# Altium PCB Off-Line 3W Non Isolated Power Supply.PcbDoc
Units mm, origin at the board's own origin, x right, y up, seen from the top; angles counter-clockwise.
Board outline 120 x 75 mm, 2 copper layers (Top Layer, Bottom Layer); 18 components, 12 nets, 48 pads, 0 vias.
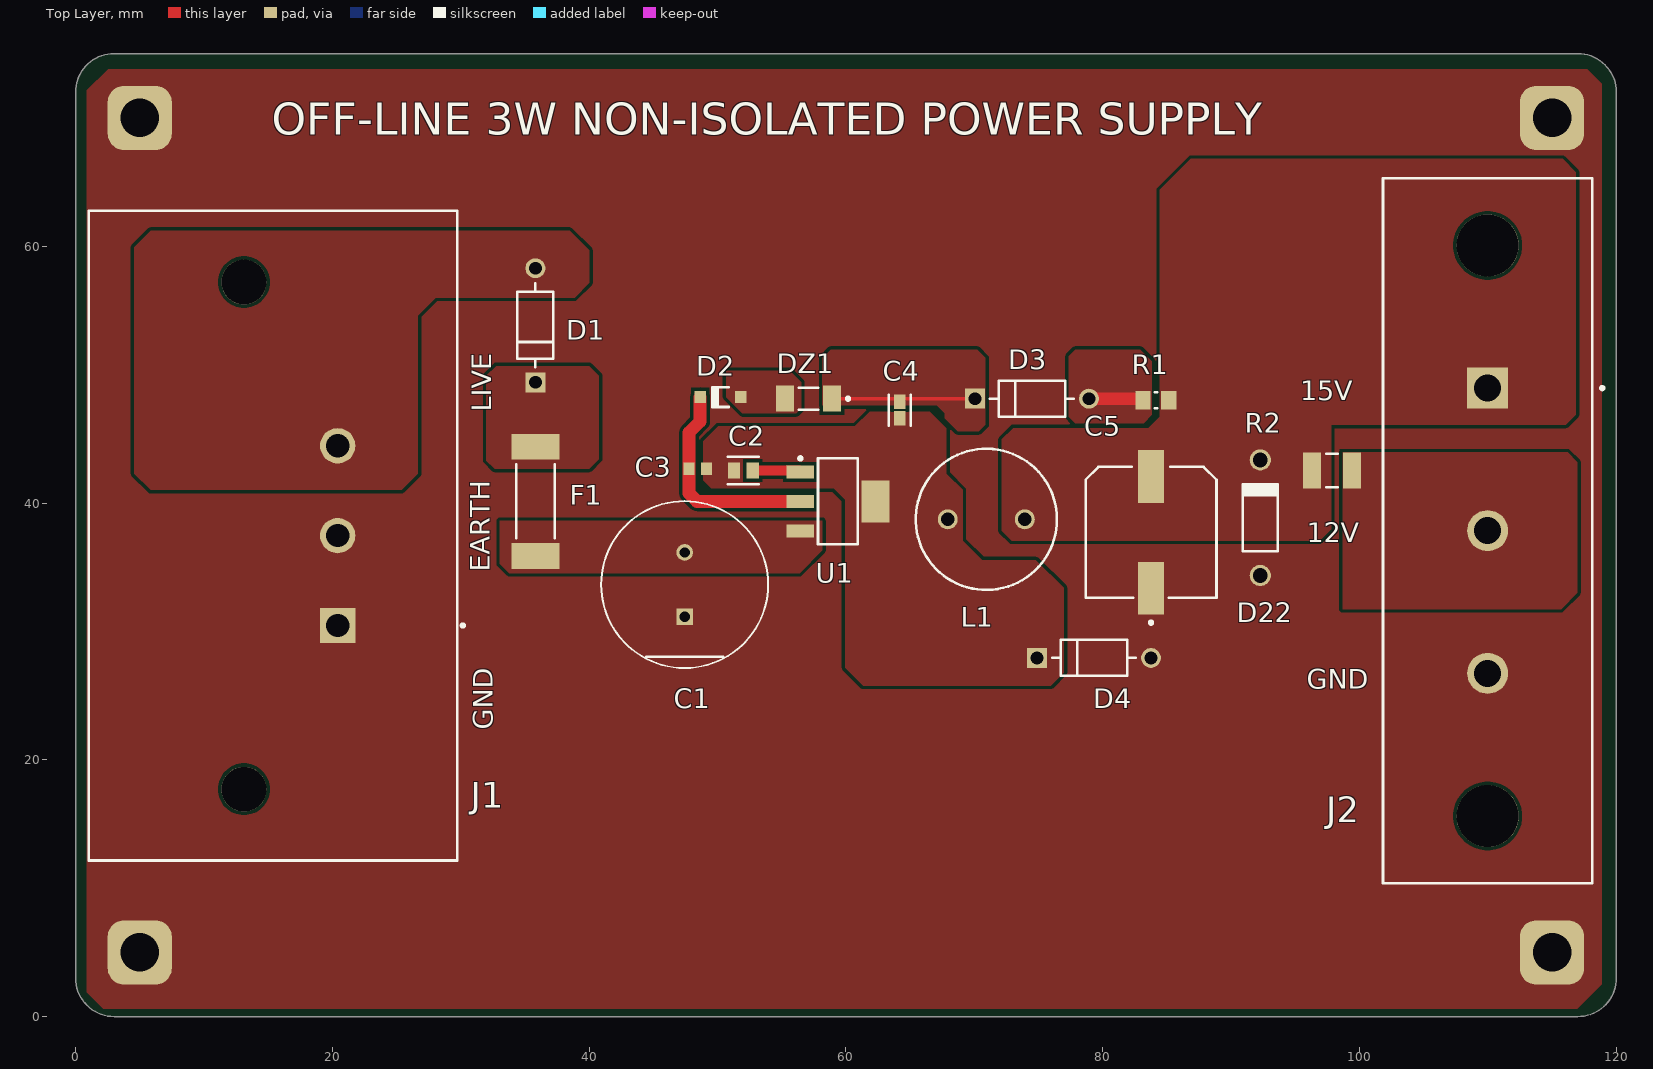
[diagram p0: Top Layer view]
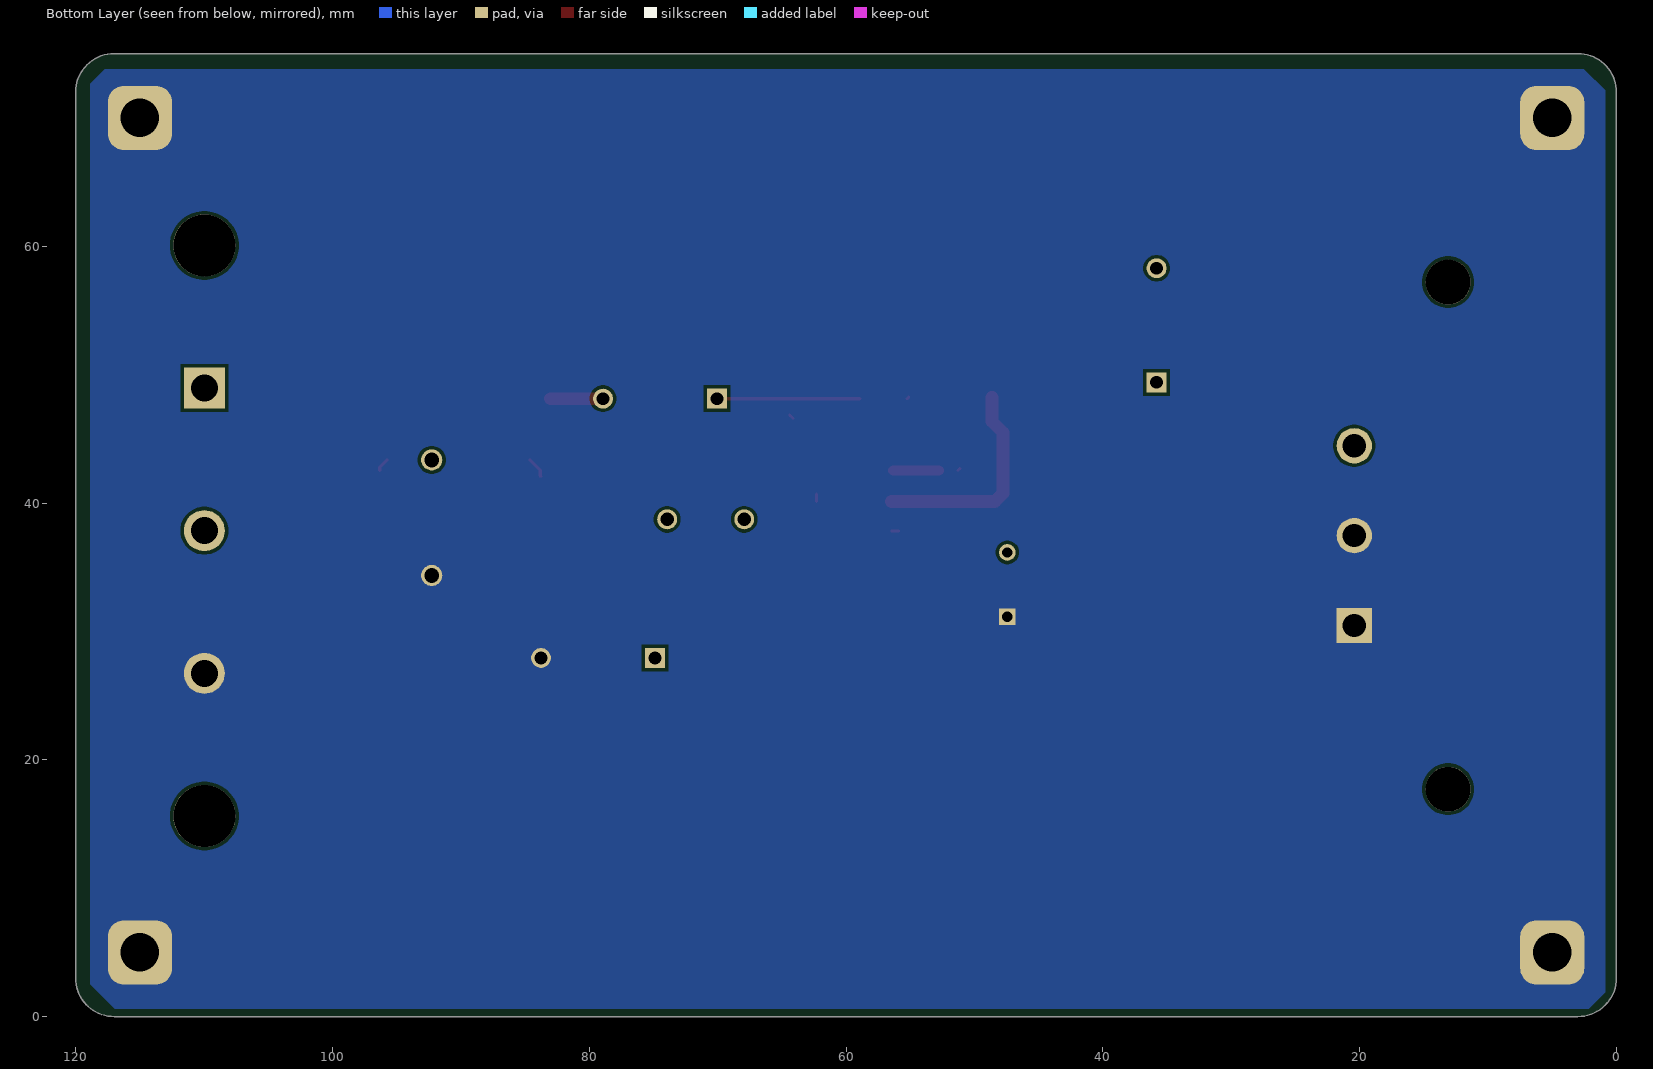
[diagram p1: Bottom Layer view, seen from below]

## Layer stack, top to bottom
Top Solder: solder mask 0.0102, Solder Resist, Dk 3.5
Top Layer: signal copper 0.0356
Dielectric 1: dielectric 0.32, FR-4, Dk 4.8
Bottom Layer: signal copper 0.0356
Bottom Solder: solder mask 0.0102, Solder Resist, Dk 3.5

## Board outline
0.006,3.006 0.006,72.006 cw(c3.006,72.006) 3.006,75.006 117.006,75.006 cw(c117.006,72.006) 120.006,72.006 120.006,3.006 cw(c117.006,3.006) 117.006,0.006 3.006,0.006 cw(c3.006,3.006)

## Design rules (kind name [scope] priority, off if disabled: settings)
Clearance [All] p1: gap=0.254 ignorepadtopadclearanceinfootprint=FALSE except(0: Arc-Hole Track-Hole SMDPad-Hole THPad-Hole Via-Hole Fill-Hole Poly-Hole Region-Hole Text-Hole; 0.1: Arc-SMDPad Track-SMDPad SMDPad-SMDPad)
PolygonConnect [All] p1: connectstyle=Direct reliefconductorwidth=0.254 reliefentries=4 polygonreliefangle="90 Angle" airgapwidth=0.254
RoutingLayers [All] p1: top layer_v5=TRUE bottom layer_v5=FALSE
RoutingVias [All] p1: holewidth=0.711 width=1.27 viastyle="Through Hole" minholewidth=0.711 minwidth=1.27 maxholewidth=0.711 maxwidth=1.27
SolderMaskExpansion [All] p1: expansion=0.102 istentingtop=FALSE
Width [All] p1: maxlimit=2 minlimit=0.254 preferedwidth=0.254
29 further rules are at their usual default settings.

## Components (designator, comment, footprint, x,y, rotation, side; value= is the part's Value field where it differs from the comment)
C1 "EEUEE2G150" FP-RAD-TH-D_12_5_0_5-L_20-MFG 47.438,33.655 r90 top
C2 "GRM21BR61C106KE15L" FP-GRM21B-0_1-IPC_C 52.01,42.545 r180 top
C3 "GRM1885C1H101JA01D" CAPC1608X90X35NL10T15 48.454,42.672 r180 top
C4 "C1608X7R1E224K080AC" FP-C1608-080-0_1-IPC_B 64.198,47.244 r90 top
C5 "EEE-FC1E331AP" FP-FC-G-MFG 83.764,37.719 r90 top
D1 "1N4007" FP-1N4007-MFG 35.814,53.848 r90 top value=15pF
D2 "1N4148W-7-F" DIOD-SOD123-2_V 50.232,48.26 r180 top
D3 "1N4007" FP-1N4007-MFG 74.489,48.133 r0 top value=15pF
D4 "1N4007" FP-1N4007-MFG 79.319,27.94 r0 top value=15pF
D22 "1N4746A" FAIR-DO-41-2_V 92.273,38.862 r90 top
DZ1 "1N5240BUR-1" FP-DO-213AA-MFG 57.09,48.133 r180 top
F1 "3403.0163.11" FP-3403_0163_11-MFG 35.814,40.132 r270 top
J1 "703W-00/52" FP-703W-00-52-MFG 15.367,37.465 r270 top
J2 "38740-6103" FP-38740-6103-MFG 109.982,37.846 r270 top
L1 "RFB1010-182L" COIL-RFB1010-2_V 70.933,38.735 r0 top
R1 "RC0805JR-072KL" RESC2013X60X35ML10T20 84.141,48.006 r0 top
R2 "CRCW121022R0JNEA" RESC3225X60X45ML20T20 97.861,42.545 r0 top
U1 "NCP1055 SOT-223" "NCP1055 SOT-223" 59.376,40.132 r0 top

## Footprints (in the part's own frame and the unit in brackets; to place one, negate y for a bottom-side part, rotate by r counter-clockwise, add the part's x,y. Pads: shape width x height; smd on the part's side, far side on the other; paste and mask are expansions set on the pad)
CAPC1608X90X35NL10T15 [mm] "Chip Capacitor, 2-Leads, Body 1.60x0.80mm, IPC Medium Density"
  rect 0.85x0.95 smd: 1(-0.675,0) 2(0.675,0)
  body extent -0.85,-0.45 0.85,0.45, height 0.9
COIL-RFB1010-2_V [mm] "Radial Leaded, 2-Leads, Dia 11mm, Height 11.5mm, Pin Spacing 6mm"
  round 1.55 hole 1.05: 1(-3,0) 2(3,0)
  Top 3D Body keep-out circle w0.1: c0,0 r5.5
  silkscreen extent -5.5,-5.5 5.5,5.5, body extent -5.5,-5.5 5.5,5.5, height 11.5
DIOD-SOD123-2_V [mm] "SOD123, 2-Leads, Body 2.7x1.55mm, Height 1.45mm"
  rect 0.9x0.95 smd: 1(-1.575,0) 2(1.575,0)
  silkscreen extent -0.64,-0.83 0.64,0.77, body extent -1.35,-0.77 1.35,0.77, height 1.45
FAIR-DO-41-2_V [mm] "2-Leads, Axial leaded, Body 2.72x5.2mm, Pin Spacing 9mm"
  round 1.65 hole 1.15: 1(-4.5,0) 2(4.5,0)
  silkscreen extent -2.6,-1.36 2.6,1.36, body extent -4.93,-1.36 4.93,1.36, height 2.71
FP-1N4007-MFG [mm]
  rect 1.55x1.55 hole 1 paste-1000 mask+0: 1(-4.44,0)
  round 1.55 hole 1 paste-1000 mask+0: 2(4.44,0)
  silkscreen extent -3.26,-1.4 3.26,1.4, body extent -5.32,-1.5 5.32,1.5, height 0.25
FP-703W-00-52-MFG [mm]
  rect 2.75x2.75 hole 1.8 paste-1000 mask+0: 1(7,5.05)
  round 2.75 hole 1.8 paste-1000 mask+0: 2(0,5.05) 3(-7,5.05)
  round 3.5 hole 3.5 unplated paste-1000 mask+0: ""(-19.75,-2.25) ""(19.75,-2.25)
  silkscreen extent -25.3,-14.35 25.3,14.93, body extent -25.4,-14.45 25.4,14.45, height 0.25
FP-3403_0163_11-MFG [mm]
  rect 2x3.75 smd paste+0 mask+0: 1(-4.25,0) 2(4.25,0)
  silkscreen extent -2.88,-1.5 2.88,1.5, body extent -5.55,-1.97 5.55,1.97, height 0.25
FP-38740-6103-MFG [mm]
  rect 3.2x3.2 hole 2.1 paste-1000 mask+0: 1(-11.115,0)
  round 3.2 hole 2.1 paste-1000 mask+0: 2(-0.005,0) 3(11.105,0)
  round 4.83 hole 4.83 unplated paste-1000 mask+0: ""(-22.22,0) ""(22.22,0)
  silkscreen extent -27.45,-8.15 27.45,9.05, body extent -27.55,-8.25 27.55,8.25, height 0.25
FP-C1608-080-0_1-IPC_B [mm]
  rect 1.131x0.912 smd paste+0 mask+0: 1(-0.641,0) 2(0.641,0)
  silkscreen extent -1.21,-0.86 1.21,0.86, body extent -1.46,-0.71 1.46,0.71, height 0.25
FP-DO-213AA-MFG [mm]
  rect 1.4x2.03 smd paste+0 mask+0: 1(-1.84,0) 2(1.84,0)
  silkscreen extent -3.2,-0.85 0.76,0.85, body extent -2.64,-1.11 2.64,1.11, height 0.25
FP-FC-G-MFG [mm]
  rect 4.1x2 smd paste+0 mask+0: 1(-4.35,0) 2(4.35,0)
  silkscreen extent -7.15,-5.1 5.1,5.1, body extent -6.65,-5.35 6.65,5.35, height 0.25
FP-GRM21B-0_1-IPC_C [mm]
  rect 0.958x1.262 smd paste+0 mask+0: 1(-0.727,0) 2(0.727,0)
  silkscreen extent -1.21,-1.07 1.21,1.07, body extent -1.31,-0.77 1.31,0.77, height 0.25
FP-RAD-TH-D_12_5_0_5-L_20-MFG [mm]
  rect 1.3x1.3 hole 0.8 paste-1000 mask+0: 1(-2.5,0)
  round 1.3 hole 0.8 paste-1000 mask+0: 2(2.5,0)
  silkscreen extent -6.5,-6.5 6.5,6.5, body extent -6.6,-6.6 6.6,6.6, height 0.25
"NCP1055 SOT-223" [mm] "SOT223, 4-Leads, Body 6.50x7.00mm (avg), Pitch 2.30mm, IPC Medium Density"
  rect 2.15x1 smd: 1(-2.925,2.3) 2(-2.925,0) 3(-2.925,-2.3)
  rect 2.15x3.25 smd: 4(2.925,0)
  silkscreen extent -3.05,-3.35 1.55,3.47, body extent -3.25,-3.35 3.75,3.35, height 1.8
RESC2013X60X35ML10T20 [mm] "Chip Resistor, 2-Leads, Body 2.00x1.25mm, IPC Low Density"
  rect 1.2x1.45 smd: 1(-1,0) 2(1,0)
  silkscreen extent -0.1,-0.63 0.1,0.63, body extent -1.05,-0.67 1.05,0.67, height 0.6
RESC3225X60X45ML20T20 [mm] "Chip Resistor, 2-Leads, Body 3.20x2.50mm, IPC Low Density"
  rect 1.4x2.8 smd: 1(-1.55,0) 2(1.55,0)
  silkscreen extent -0.45,-1.3 0.45,1.3, body extent -1.7,-1.35 1.7,1.35, height 0.6

## Part data
C1: library part CMP-05427-000533-1, "Aluminum Electrolytic Capacitors (Radial Lead Type) 15uF ±20% 400V", Capacitance=15uF, Case/Package=Radial, Dielectric Material=Aluminium, Leakage Current=370uA, Max Operating Temperature=105°C, Min Operating Temperature=-25°C, Package Quantity=200, Ripple Current=590mA, Tolerance=20%, Voltage=400V, Construction=RADIAL, Diameter=12.5mm, Dissipation Factor=0.24%, Height=20mm, Height - Seated (Max)=0.866inch, Lead Diameter=0.6mm, Lead Free="Lead Free", Lead Pitch=5mm, Length=20mm, Life (Hours)=10000Hour, Mount="Through Hole", Number of Pins=2, Packaging=Bulk, Polarity=Polar, Radiation Hardening=No, REACH SVHC="No SVHC", Ripple Current (AC)=590mA, RoHS Compliant=Yes, Series=EE, Termination=Radial, Voltage Rating=400V, Voltage Rating (DC)=400V
C2: library part CMP-2007-03453-2, "Chip Multilayer Ceramic Capacitors for General Purpose, 0805, 10uF, X5R, 15%, 10%, 16V", Capacitance=10uF, Case Code (Imperial)=0805, Case Code (Metric)=2012, Dielectric=X5R, Max Operating Temperature=85°C, Min Operating Temperature=-55°C, Package Quantity=1, Tolerance=10%, Voltage=16V, Case/Package=0805, Depth=1.25mm, Height=1.25mm, Lead Free="Lead Free", Length=2mm, Material=Ceramic, Mount="Surface Mount", Packaging="Tape and Reel", Radiation Hardening=No, REACH SVHC="No SVHC", Termination=SMD/SMT, Thickness=0.053inch, Voltage Rating=16V, Voltage Rating (DC)=16V, Width=1.25mm
C3: library part CMP-2006-02595-1, Manufacturer=Murata, Part Number=GRM1885C1H101JA01D
C4: library part CMP-08246-006302-1, "Multilayer Ceramic Capacitors 220nF ±10% 25V X7R SMD 0603", Capacitance=220nF, Case Code (Imperial)=0603, Case Code (Metric)=1608, Dielectric=X7R, Dielectric Material=Ceramic, Max Operating Temperature=125°C, Min Operating Temperature=-55°C, Package Quantity=1, Tolerance=10%, Voltage Rating=25V, Case/Package=0603, Construction=Flat, Depth=0.8mm, Height=0.8mm, Lead Free="Lead Free", Length=1.6mm, Mount="Surface Mount", Number of Pins=2, Packaging="Tape and Reel", Radiation Hardening=No, REACH SVHC="No SVHC", Resistor Type=Ceramic, RoHS Compliant=Yes, Series=C, Termination=SMD/SMT, Thickness=0.037inch, Voltage Rating (DC)=25V, Weight=7.1E-05oz, Width=0.031inch
C5: library part CMP-05427-000018-1, "CAP ALUM 330UF 20% 25V SMD", Capacitance=330uF, Case/Package=Radial, Dielectric Material=Aluminium, ESR (Equivalent Series Resistance)=150mR, Leakage Current=3uA, Max Operating Temperature=105°C, Min Operating Temperature=-40°C, Package Quantity=1, Ripple Current=670mA, Tolerance=20%, Voltage=25V, Contact Plating=Tin, Diameter=10mm, Height=10.2mm, Height - Seated (Max)=0.402inch, Impedance=150mR, Lead Free="Lead Free", Lead Length=3.5mm, Lead Pitch=4.6mm, Length=10.5mm, Life (Hours)=1000Hour, Mount="Surface Mount", Number of Pins=2, Packaging="Tape and Reel", Radiation Hardening=No, REACH SVHC="No SVHC", Ripple Current (AC)=670mA, Termination=SMD/SMT, Voltage Rating=25V, Voltage Rating (DC)=25V, Width=10.3mm
D1 D3 D4: library part CMP-123542-000001-1, "Rectifier diode 1000 V 1 A DO-41, ,", Capacitance=15pF, Forward Current=1A, Manufacturer=Diotec, Max Junction Temp=+175°C, Max Repetitive Reverse Voltage=1000V, Max Surge Forward Current=27A, Peak Reverse Current=5uA, Temperature="-50°C to +175°C", Temperature Range Low=-50°C, Automotive=No, Category=Diode, ComponentLink2Description=Datasheet, ComponentLink2URL=https://datasheet.octopart.com/1N4007-Diotec-datasheet-62346875.pdf, Device Class L1="Discrete Semiconductors", Device Class L2=Diodes, Device Class L3="Rectifier Diodes", Height=2.8mm, Ipc Land Pattern Name=DIOAD888W100L520D280, Lead Free=Yes, Manufacturer Part Number=1N4007, Octopart=https://octopart.com/1n4007-diotec-4040411, Package=1N4007, Reverse Voltage=1000V, RoHS=TRUE, Temperature Range High=+175°C
D2: library part CMP-2000-04932-2, "Fast Switching Diode, 100 V, 0.15 A, -65 to 150 degC, 2-Pin?SOD123, RoHS, Tape and Reel", If - Forward Current=0.15A, Ir - Reverse Current=1uA, Manufacturer=DiodesIncorporated, Max Surge Current=2A, Maximum Operating Temperature=+150C, Minimum Operating Temperature=-65C, Operating Temperature Range=-65Cto+150C, Package / Case=SOD-123, Package Reference=SOD123-2, Peak Reverse Voltage=100V, Vf - Forward Voltage=1.25V, Brand=DiodesIncorporated, Configuration=Single, Datasheet URL=http://www.farnell.com/datasheets/1915529.pdf, Datasheet Version="Rev. 24-2, 10/2013", Factory Pack Quantity=3000, Height=1.25mm, Length=2.85mm, Manufacturer URL=http://www.diodes.com/, Mounting Style=SMD/SMT, Package URL=http://www.diodes.com/datasheets/ds18004.pdf, Packaging=Reel, Product=SwitchingDiodes, Product Category=Diodes-GeneralPurpose,Power,Switching, Recovery Time=4ns, RoHS=True, Series=1N4148, Type=SwitchingDiode, Unit Weight=0.000353oz, Width=1.7mm
D22: library part CMP-0892-00023-1, "Zener Diode, 18V, 1W, 5%, -65 to 200 degC, 2-Pin DO-41, Body 2.72 x 5.2 mm, RoHS", Manufacturer="Fairchild Semiconductor", Operating and Storage Temperature Range="-65 to 200 degC", Test Current IZ (mA)=14, Tolerance=5%, ComponentLink1Description="Manufacturer URL", ComponentLink1URL=http://www.fairchildsemi.com/, ComponentLink2Description=Datasheet, ComponentLink2URL=http://www.fairchildsemi.com/ds/1N/1N4744A.pdf, ComponentLink3Description="Package Specification", ComponentLink3URL=http://www.fairchildsemi.com/dwg/DO/DO41A.pdf, DatasheetVersion="Rev. H3", IR (uA)=5, Mounting Technology="Through Hole", PackageDescription="2-Pin Axial leaded, Body 2.72 x 5.2 mm, Lead Spread 25.4 mm", PackageReference=DO-41-2, PackageVersion="Rev. 2", PartNumber=1N4746A, PD (W)=1, RoHS=TRUE, VZ (Max.) (V)=18.9, VZ (Min.) (V)=17.1, ZZ (Max) (ohm)=16
DZ1: library part CMP-06360-000046-1, "DIODE ZENER"
F1: library part CMP-26293-000009-1, "FUSE BRD MNT 500MA 250VAC 125VDC", Ambient Temperature Range High=+125°C, Ambient Temperature Range Low=-55°C, Fuse Current=0.5A, Fuse Voltage Drop=600mV, Manufacturer="Schurter Inc", Max Fuse Ac Voltage=250V, Max Fuse Dc Voltage=125V, Package=0, Automotive=No, Category=Fuse, ComponentLink2Description=Datasheet, ComponentLink2URL=https://us.schurter.com/bundles/snceschurter/epim/_ProdPool_/newDS/en/typ_UMT_250.pdf, Device Class L1="Circuit Protection", Device Class L2=Fuses, Device Class L3=unset, Digikey Description="FUSE BRD MNT 500MA 250VAC 125VDC", Fuse Blow Speed=Slow, Fuse I2T=0.54A2Sec, Height=3mm, Lead Free=Yes, Manufacturer Part Number=3403.0163.11, Mouser Description="Surface Mount Fuses UMT 250 500mA 277V Slow", Octopart=https://octopart.com/3403.0163.11-schurter-65395, RoHS=TRUE, Voltage Rating=125V
J1: library part CMP-64678-000001-1, "PWR ENT RCPT IEC320-C14 PNL SLDR", Color=Black, Current=15A, Max Voltage Rating (AC)=250V, Package Quantity=100, Approvals=UL, Connector Type=Receptacle, Contact Plating=Tin, Current Rating=15A, Fuse=No, Gender=Receptacle, Housing Material=Thermoplastic, Lead Free="Lead Free", Max Current Rating=15A, Mount="Through Hole", Number of Contacts=3, Number of Poles=2, Number of Positions=3, Orientation="Right Angle", Packaging=Bulk, Panel Thickness=0.12inch, Pitch=7mm, REACH SVHC="No SVHC", Termination=Solder, Voltage Rating=250V, Voltage Rating (AC)=250V, Voltage Rating (DC)=250V
J2: library part CMP-00257-08326119-1, "38740-6103 11.11mm Pitch Beau PCB Fixed Mount Barrier Terminal Strip, Low Profile, 300V, 3 Circuits", Color=Black, Current Rating=15A, Manufacturer Lifecycle Status=ACTIVE, Max Operating Temperature=130°C, Min Operating Temperature=-40°C, Voltage Rating=300V, Contact Material="Brass, Tin", Contact Plating=Tin, Country of Origin=US, ELV=Compliant, Height=14.478mm, Length=54.61mm, Lifecycle Status=Production, Material=Brass, NexarPartId=8326119, Number of Circuits=3, Number of Contacts=3, Number of Poles=3, Number of Positions=3, Number of Rows=1, Orientation=Horizontal, Pitch=11.11mm, Plating=Tin, RoHS=Compliant, Termination=Screw, Width=16.002mm, Wire Gauge (Max)=10AWG, Wire Gauge (Min)=24AWG
L1: library part CMP-0899-00024-1, "Power Inductor, 1.8 mH +/- 10%, 0.45 A, -40 to 125 degC, 2-Pin Radial Leaded, Dia 11 mm, RoHS, Tray", Ambient Temperature Range="-40 to 125 degC", Inductance="1.8 mH", Manufacturer=Coilcraft, Tolerance=10%, ComponentLink1Description="Manufacturer URL", ComponentLink1URL=http://www.coilcraft.com/, ComponentLink2Description=Datasheet, ComponentLink2URL=http://www.coilcraft.com/pdfs/rfb.pdf, DatasheetVersion=Sep-13, DCR="3.5 Ohm Max.", Irms="0.55 A @40 degC", Isat="0.45 A", Mounting Technology="Through Hole", PackageDescription="2-Pin Radial Leaded, Dia 11 mm, Height 11.5 mm, Radial 6 mm", PackageReference=RFB1010-2, Packing=Tray, PartNumber=RFB1010-182L, RoHS=TRUE, SRF="1.3 MHz"
R1: library part CMP-2001-01361-1, Manufacturer=Yageo, Part Number=RC0805JR-072KL
R2: library part CMP-2005-02071-1, Manufacturer="Vishay Dale", Part Number=CRCW121022R0JNEA

## Free pads (board coordinates)
  rrect50% 5x5 hole 3: 5(5,5) 5(5,70) 5(115,5) 5(115,70)

## Nets (pads, with @x,y where several pads share a name; then routed paths per layer and width w, separated by ;. In a path a pad name is that pad's centre, name@x,y a point inside that pad or via, vN(x,y) a via of type N, cw(c..) or ccw(c..) an arc to the next point about the centre after c; other vN are vias at no path point)
12V: J2.2 R2.2
15V: C5.2 D22.2 J2.1 L1.2 R1.2 R2.1 | length 2.7
  Top Layer w0.254: C5.2 83.82,42.125 83.82,42.545 C5.2@84.637,43.362 ; R2.1@95.738,43.362 96.311,42.789 R2.1
Control: C3.2 D2.2 U1.2 | length 16.8
  Top Layer w0.254: D2.2@48.641,48.244 D2.2
  Top Layer w1: D2.2@48.641,48.244 48.641,46.355 47.779,45.493 C3.2 47.779,40.767 48.414,40.132 U1.2
D1F1Node: D1.1 F1.1
D2DZ1Node: D2.1 DZ1.2 | length 0.2
  Top Layer w0.254: DZ1.2@55.123,48.26 DZ1.2
D3R1Node: D3.2 R1.1 | length 3.9
  Top Layer w0.254: R1.1@83.014,48.133 R1.1
  Top Layer w1: D3.2@79.259,48.133 R1.1@83.014,48.133
DiodeCap: C4.2 D3.1 DZ1.1 | length 10.8
  Top Layer w0.254: DZ1.1 64.383,48.133 64.389,48.139 64.395,48.133 D3.1@69.719,48.133
Drain: C1.2 F1.2 U1.3 | length 0.7
  Top Layer w0.254: C1.2@47.382,36.211 C1.2 ; U1.3@55.876,37.832 U1.3
GND: C1.1 C5.1 D4.2 D22.1 J1.1 J1.2 J2.3 pad.5
ICGround: C2.2 C3.1 C4.1 D4.1 L1.1 U1.4 | length 1.3
  Top Layer w0.254: C2.2@51.156,42.672 C2.2 ; U1.4 U1.4@62.301,40.682 ; C4.1@64.135,46.603 C4.1@64.389,46.857 ; L1.1 L1.1@67.945,38.747 ; D4.1@74.422,28.067 D4.1@74.549,27.94
LIVE: D1.2 J1.3
Vcc: C2.1 U1.1 | length 3.8
  Top Layer w0.254: U1.1@56.338,42.545 U1.1
  Top Layer w0.762: C2.1 U1.1@56.338,42.545
pads on no net: J1. J2.

## Polygon pours and split planes (outlines as drawn)
GND on Top Layer "NONET_L01_P-001" (solid, pour order 10): 117.729,73.787 118.872,72.644 118.872,2.54 116.967,0.635 2.159,0.635 0.889,1.905 0.889,72.136 2.54,73.787
D1F1Node on Top Layer "NONET_L01_P-001" (solid, pour order 9): 40.005,50.673 40.767,49.911 40.767,43.434 40.005,42.672 32.639,42.672 32.004,43.307 32.004,49.911 32.766,50.673 35.941,50.673
LIVE on Top Layer "NONET_L01_P-001" (solid, pour order 8): 20.574,61.214 38.481,61.214 40.005,59.69 40.005,57.15 38.862,56.007 28.067,56.007 26.67,54.61 26.67,42.291 25.4,41.021 5.842,41.021 4.572,42.291 4.572,59.944 5.842,61.214
D3R1Node on Top Layer "NONET_L01_P-001" (solid, pour order 7): 83.82,46.863 83.185,46.228 77.851,46.228 77.343,46.736 77.343,51.435 77.851,51.943 82.931,51.943 83.82,51.054
12V on Top Layer "NONET_L01_P-001" (solid, pour order 6): 116.205,43.942 116.967,43.18 116.967,33.02 115.697,31.75 99.568,31.75 98.679,31.75 98.679,33.528 98.679,43.942 99.314,43.942
15V on Top Layer "NONET_L01_P-001" (solid, pour order 5): 116.078,46.101 116.84,46.863 116.84,65.786 115.824,66.802 86.868,66.802 84.455,64.389 84.455,46.101 95.504,46.101
DiodeCap on Top Layer "NONET_L01_P-001" (solid, pour order 4): 70.231,51.943 70.866,51.308 70.866,46.101 70.358,45.593 68.707,45.593 67.691,46.609 67.691,46.99 67.056,47.625 58.166,47.625 58.166,51.308 58.801,51.943 62.611,51.943
Drain on Top Layer "DRAIN_L01_P000" (solid, pour order 0): 33.058,35.268 33.782,34.544 56.388,34.544 58.166,36.322 58.166,38.608 33.058,38.608
D2DZ1Node on Top Layer "D2DZ1NODE_L01_P001" (solid, pour order 1): 50.673,48.26 51.943,46.99 56.134,46.99 56.515,47.371 56.515,49.403 55.626,50.292 50.673,50.292
15V on Top Layer "15V_L01_P002" (solid, pour order 2): 72.136,37.846 72.898,37.084 96.901,37.084 97.79,37.973 97.79,47.879 96.52,49.149 84.455,49.149 84.455,46.736 83.566,45.847 73.025,45.847 72.136,44.958
ICGround on Top Layer "ICGROUND_L01_P003" (solid, pour order 3): 48.895,41.783 49.53,41.148 59.055,41.148 59.944,40.259 59.944,27.178 61.341,25.781 75.946,25.781 76.962,26.797 76.962,33.401 74.803,35.56 70.612,35.56 69.088,37.084 69.088,41.021 67.818,42.291 67.818,45.847 66.548,47.117 61.849,47.117 60.706,45.974 50.038,45.974 48.895,44.831
GND on Bottom Layer "NONET_L01_P-001" (solid, pour order 11): 117.729,73.787 118.872,72.644 118.872,2.54 116.967,0.635 2.159,0.635 0.889,1.905 0.889,72.136 2.54,73.787

## Silkscreen, mask and mechanical layers (free items; w line width, h text height)
Top Overlay:
  text "OFF-LINE 3W NON-ISOLATED POWER SUPPLY" at 15.3,68.707 h2.5
  text "15V" at 95.377,48.006 h1.52
  text "LIVE" at 32.385,47.117 h1.52 r90
  text "12V" at 95.885,36.957 h1.52
  text "EARTH" at 32.258,34.671 h1.52 r90
  text "GND" at 95.885,25.527 h1.52
  text "GND" at 32.512,22.352 h1.52 r90
Mechanical 1:
  the board outline again, w0.013